# EAGLE board ReferencePCB (EAGLE 6.3)
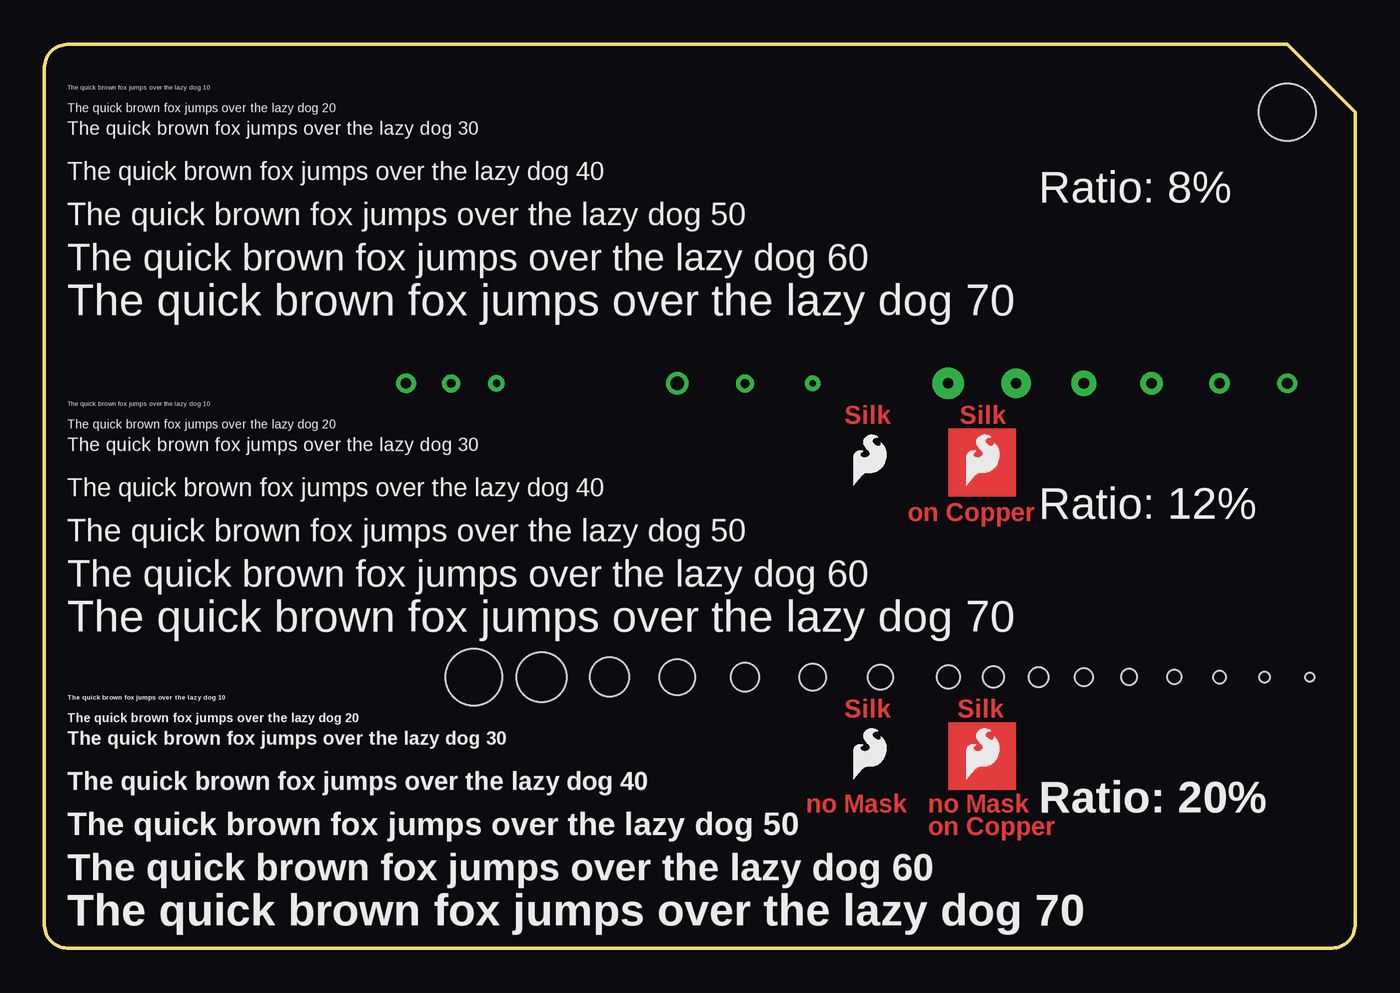
[diagram p0: board, top side]
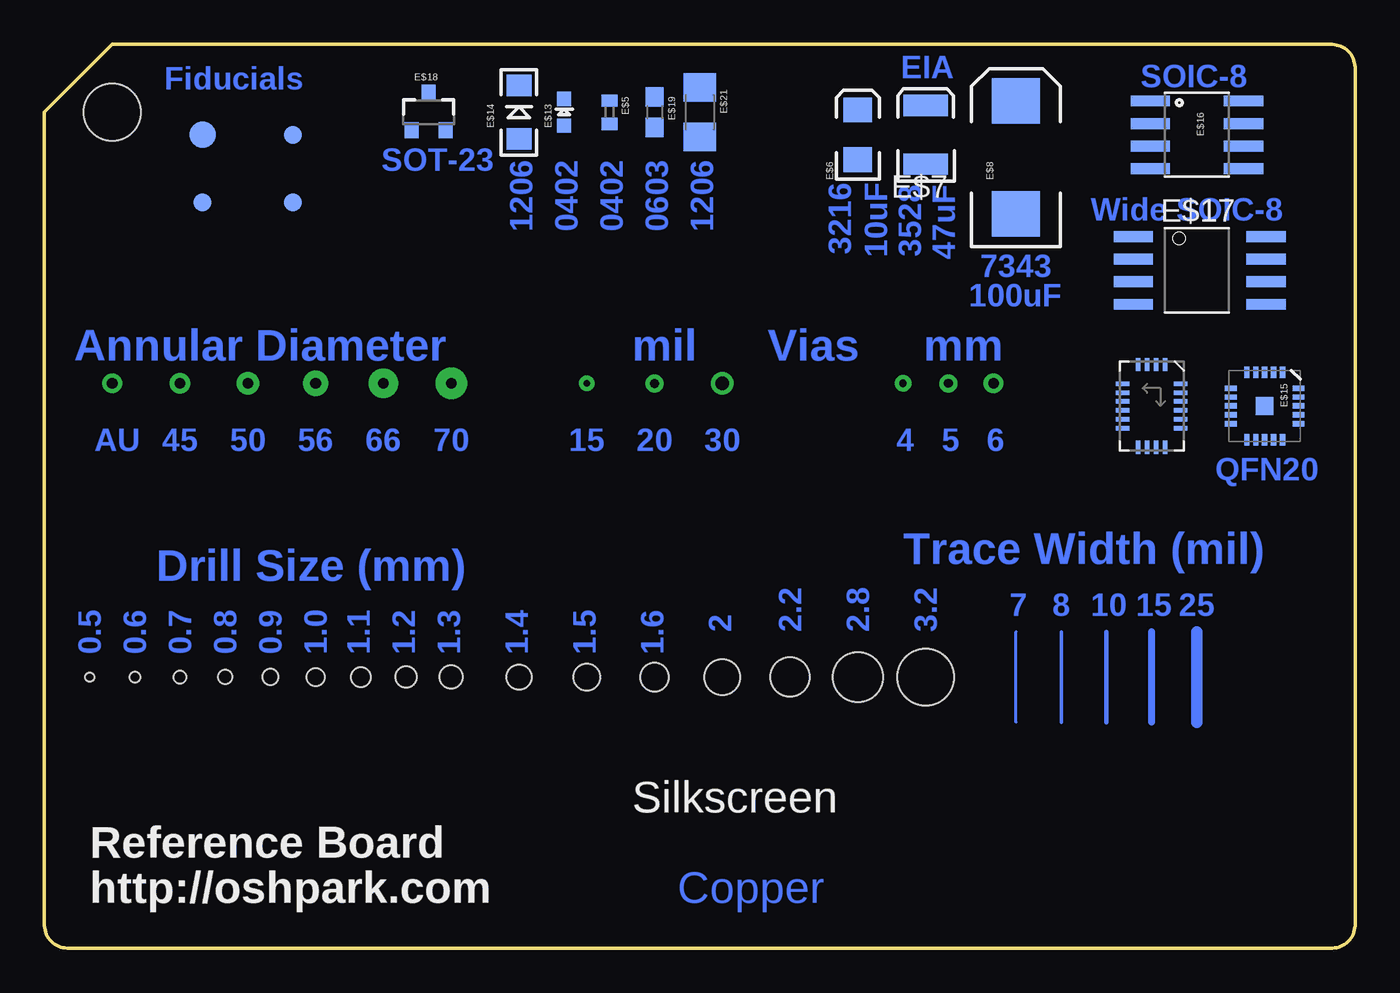
[diagram p1: board, bottom side, seen from below]

Size 73.66 x 50.8 mm. Coordinates in mm from the lower left corner, seen from the top.
Outline: 1.27,50.8 69.85,50.8 73.66,46.99 73.66,1.27 arc-87 72.39,0 1.27,0 arc-87 0,1.27 0,49.53 arc-87 1.27,50.8
Copper layers (1*16): Top 0.035mm / dielectric 1.5mm / Bottom 0.035mm
Design rules "SparkFun *": minimum track width 7mil, minimum drill 7mil, track to track 8mil, track to pad 8mil, pad to pad 7mil, via to via 8mil, smd to smd 8mil, copper to edge 10mil, drill to drill 8mil, minimum pad ring 12mil, minimum via ring 10mil, stop-mask expansion 4mil, vias tented up to drill 20mil, thermal gap 10mil
Holes 0.5 mm at 71.12,15.24
Holes 0.6 mm at 68.58,15.24
Holes 0.7 mm at 66.04,15.24
Holes 0.8 mm at 63.5,15.24
Holes 0.9 mm at 60.96,15.24
Holes 1 mm at 58.42,15.24
Holes 1.1 mm at 55.88,15.24
Holes 1.2 mm at 53.34,15.24
Holes 1.3 mm at 50.8,15.24
Holes 1.4 mm at 46.99,15.24
Holes 1.5 mm at 43.18,15.24
Holes 1.6 mm at 39.37,15.24
Holes 2 mm at 35.56,15.24
Holes 2.2 mm at 31.75,15.24
Holes 2.8 mm at 27.94,15.24
Holes 3.2 mm at 24.13,15.24 69.85,46.99

## Footprints (pad centres in the part's own frame; a part is rotated, then mirrored left to right if it is on the bottom)
C0402 = smd 0.7 x 0.9: 1 -0.65,0; 2 0.65,0
EIA3216 = smd 1.4 x 1.6: A 1.4,0; C -1.4,0
EIA3528 = smd 1.2 x 2.5: A 1.65,0; C -1.65,0
EIA7343 = smd 2.55 x 2.7: A 3.17,0; C -3.17,0
FIDUCIAL = smd 1 x 1: 1 0,0
FIDUCIAL-1.5X3 = smd 1.5 x 1.5: 1 0,0
FIDUCIAL-1X2 = smd 1 x 1: 1 0,0
FIDUCIAL-1X2.5 = smd 1 x 1: 1 0,0
LED-0603 = smd 0.8 x 0.8: A 0,-0.75; C 0,0.75
LED-1206 = smd 1.2 x 1.4: A -1.5,0; C 1.5,0
QFN20 = smd 1 x 1: 0 0,0 | smd 0.65 x 0.3: 1 -1.9,1; 2 -1.9,0.5; 3 -1.9,0; 4 -1.9,-0.5; 5 -1.9,-1; 11 1.9,-1; 12 1.9,-0.5; 13 1.9,0; 14 1.9,0.5; 15 1.9,1 | smd 0.3 x 0.65: 6 -1,-1.9; 7 -0.5,-1.9; 8 0,-1.9; 9 0.5,-1.9; 10 1,-1.9; 16 1,1.9; 17 0.5,1.9; 18 0,1.9; 19 -0.5,1.9; 20 -1,1.9
SO08 = smd 0.61 x 2.21: 1 -1.905,-2.616; 2 -0.635,-2.616; 3 0.635,-2.616; 4 1.905,-2.616; 5 1.905,2.616; 6 0.635,2.616; 7 -0.635,2.616; 8 -1.905,2.616
SO08WIDE = smd 0.61 x 2.21: 1 -1.905,-3.569; 2 -0.635,-3.569; 3 0.635,-3.569; 4 1.905,-3.569; 5 1.905,3.886; 6 0.635,3.886; 7 -0.635,3.886; 8 -1.905,3.886
SOT23-3 = smd 0.8 x 0.9: 1 -0.95,-1; 2 0.95,-1; 3 0,1.1
0603 = smd 1.1 x 1: 1 -0.85,0; 2 0.85,0
1206 = smd 1.6 x 1.8: 1 -1.4,0; 2 1.4,0
HMC6042 = smd 0.75 x 0.25: 1 -2.325,0.75; 2 -2.325,0.25; 3 -2.325,-0.25; 4 -2.325,-0.75; 11 2.325,-0.75; 12 2.325,-0.25; 13 2.325,0.25; 14 2.325,0.75 | smd 0.25 x 0.75: 5 -1.25,-1.625; 6 -0.75,-1.625; 7 -0.25,-1.625; 8 0.25,-1.625; 9 0.75,-1.625; 10 1.25,-1.625; 15 1.25,1.625; 16 0.75,1.625; 17 0.25,1.625; 18 -0.25,1.625; 19 -0.75,1.625; 20 -1.25,1.625

## Placement (x,y rotation side)
E$1  [SFE-LOGO-FLAME]  45.47,9.53 0 top
E$2  [SFE-LOGO-FLAME]  51.82,9.53 0 top
E$3  [SFE-LOGO-FLAME]  45.47,26.04 0 top
E$4  [SFE-LOGO-FLAME]  51.82,26.04 0 top
E$5  [C0402]  41.91,46.99 270 bottom
E$6  [EIA3216]  27.94,45.72 90 bottom
E$7  [EIA3528]  24.13,45.72 90 bottom
E$8  [EIA7343]  19.05,44.45 90 bottom
E$9  [FIDUCIAL]  64.77,41.91 90 bottom
E$10  [FIDUCIAL-1.5X3]  64.77,45.72 90 bottom
E$11  [FIDUCIAL-1X2]  59.69,41.91 90 bottom
E$12  [FIDUCIAL-1X2.5]  59.69,45.72 90 bottom
E$13  [LED-0603]  44.45,46.99 0 bottom
E$14  [LED-1206]  46.99,46.99 90 bottom
E$15  [QFN20]  5.08,30.48 270 bottom
E$16  [SO08]  8.89,45.72 270 bottom
E$17  [SO08WIDE]  8.89,38.1 270 bottom
E$18  [SOT23-3]  52.07,46.99 0 bottom
E$19  [0603]  39.37,46.99 270 bottom
E$21  [1206]  36.83,46.99 270 bottom
E$23  [HMC6042]  11.43,30.48 270 bottom

## Library data of the parts
E$1-E$19 E$21 E$23 = SparkFun

## Tracks (layer width: path | path; a pad name or v marks a point on that pad's centre or on a via)
S$1
  Bottom 0.635: 8.89,12.7 8.89,17.78
S$2
  Bottom 0.381: 11.43,12.7 11.43,17.78
S$3
  Bottom 0.254: 13.97,12.7 13.97,17.78
S$4
  Bottom 0.203: 16.51,12.7 16.51,17.78
S$5
  Bottom 0.178: 19.05,12.7 19.05,17.78
S$12  (via drill 0.6)
  other vias: 20.32,31.75
S$13  (via drill 0.5)
  other vias: 22.86,31.75
S$14  (via drill 0.4)
  other vias: 25.4,31.75
S$18  (via drill 0.76)
  other vias: 35.56,31.75
S$19  (via drill 0.51)
  other vias: 39.37,31.75
S$20  (via drill 0.38)
  other vias: 43.18,31.75
S$23  (via drill 0.6 pad 1.42)
  other vias: 58.42,31.75
S$24  (via drill 0.6 pad 1.27)
  other vias: 62.23,31.75
S$25  (via drill 0.6, 0.6 pad 1.14)
  other vias: 66.04,31.75 69.85,31.75
S$26  (via drill 0.6 pad 1.68)
  other vias: 54.61,31.75
S$27  (via drill 0.6 pad 1.78)
  other vias: 50.8,31.75
(copper drawn outside any net)
  shapes: Top area x2

## Text on the board
Top: Silk | Silk | on Copper | Silk | Silk | no Mask | no Mask | on Copper
Bottom: EIA | SOIC-8 | Fiducials | SOT-23 | 1206 | 0603 | 0402 | 0402 | 1206 | 47uF | 3528 | 10uF | 3216 | Wide SOIC-8 | 7343 | 100uF | mm | Vias | mil | Annular Diameter | 6 | 5 | 4 | 30 | 20 | 15 | 70 | 66 | 56 | 50 | 45 | AU | QFN20 | Trace Width (mil) | Drill Size (mm) | 25 | 15 | 10 | 8 | 7 | 3.2 | 2.8 | 2.2 | 2 | 1.6 | 1.5 | 1.4 | 1.3 | 1.2 | 1.1 | 1.0 | 0.9 | 0.8 | 0.7 | 0.6 | 0.5 | Copper
tPlace: The quick brown fox jumps over the lazy dog 10 | The quick brown fox jumps over the lazy dog 20 | The quick brown fox jumps over the lazy dog 30 | The quick brown fox jumps over the lazy dog 40 | Ratio: 8% | The quick brown fox jumps over the lazy dog 50 | The quick brown fox jumps over the lazy dog 60 | The quick brown fox jumps over the lazy dog 70 | The quick brown fox jumps over the lazy dog 10 | The quick brown fox jumps over the lazy dog 20 | The quick brown fox jumps over the lazy dog 30 | The quick brown fox jumps over the lazy dog 40 | Ratio: 12% | The quick brown fox jumps over the lazy dog 50 | The quick brown fox jumps over the lazy dog 60 | The quick brown fox jumps over the lazy dog 70 | The quick brown fox jumps over the lazy dog 10 | The quick brown fox jumps over the lazy dog 20 | The quick brown fox jumps over the lazy dog 30 | The quick brown fox jumps over the lazy dog 40 | Ratio: 20% | The quick brown fox jumps over the lazy dog 50 | The quick brown fox jumps over the lazy dog 60 | The quick brown fox jumps over the lazy dog 70
bPlace: Silkscreen
bStop: SolderMask
_bsilk: Reference Board | http://oshpark.com